# Altium PCB powersuuply.PcbDoc
Units mm, origin at the board's own origin, x right, y up, seen from the top; angles counter-clockwise.
Board outline 81.66 x 59.31 mm, 2 copper layers (Top Layer, Bottom Layer); 15 components, 12 nets, 61 pads, 0 vias.
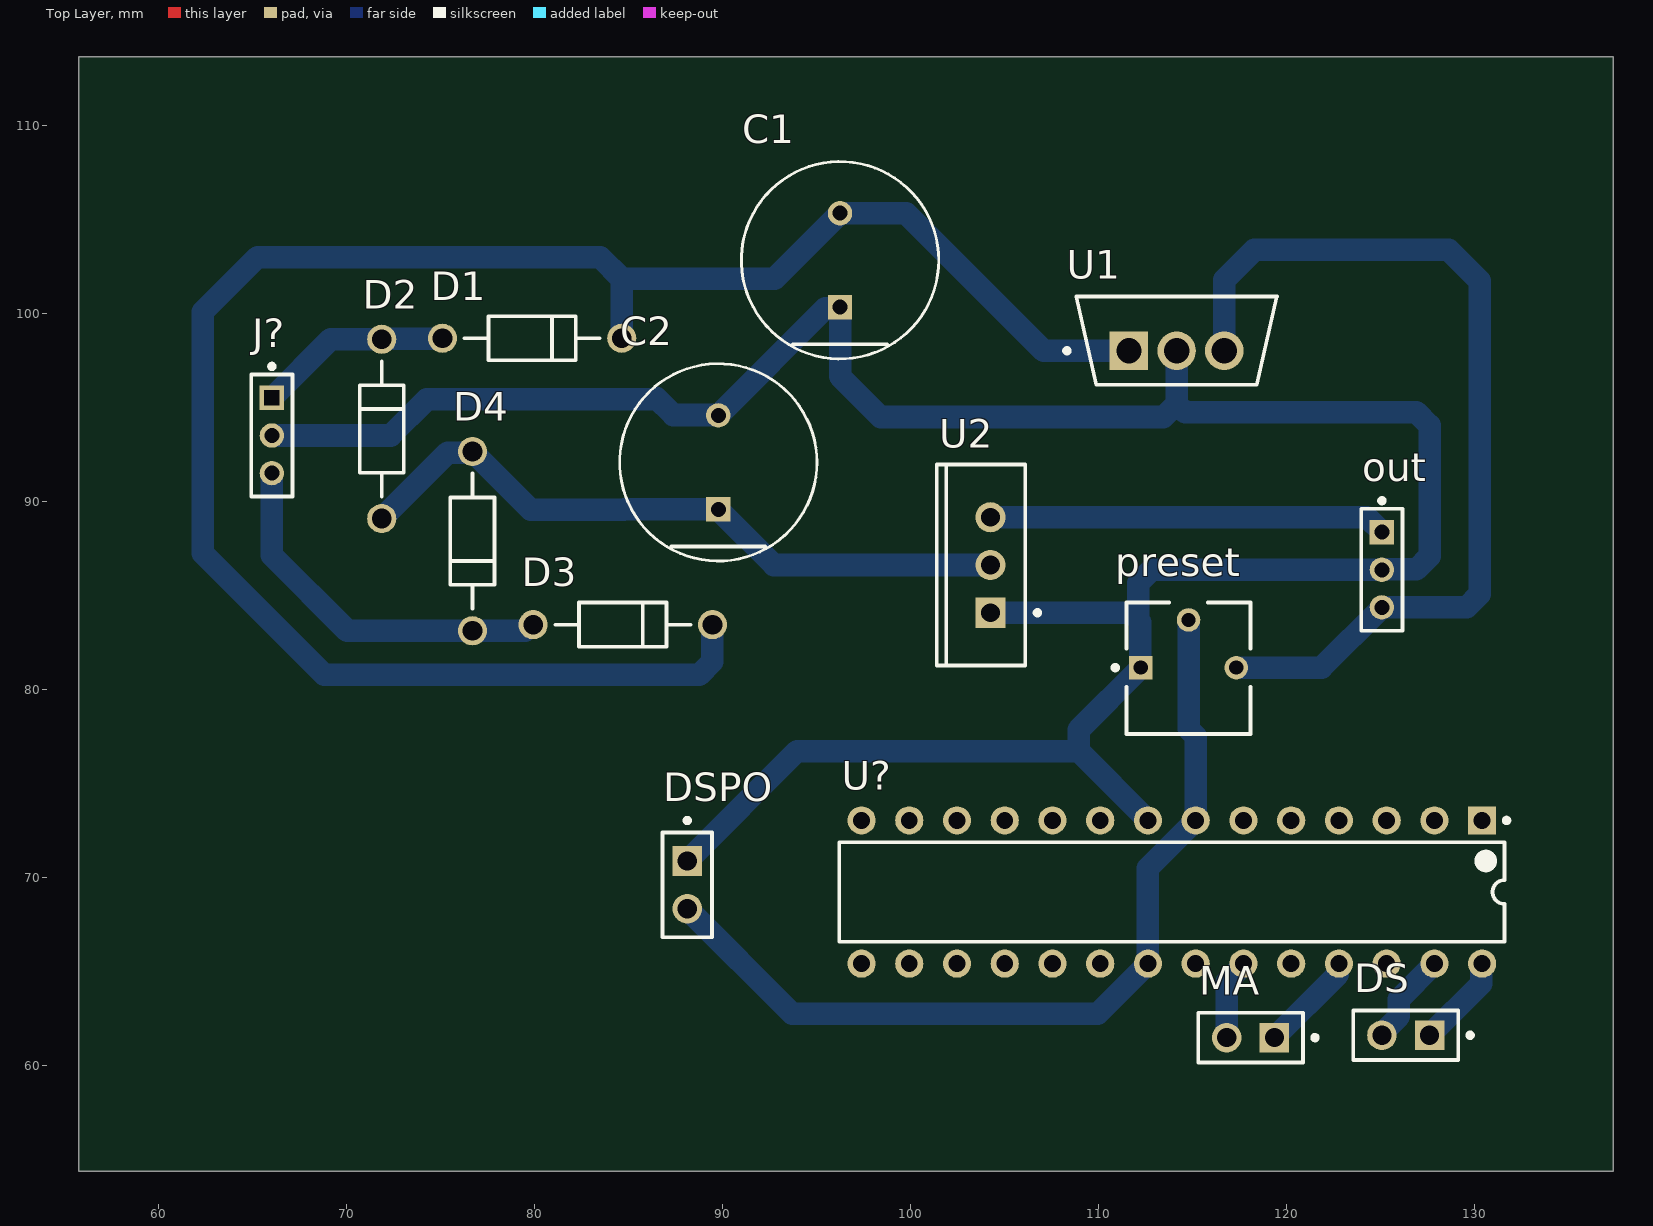
[diagram p0: Top Layer view]
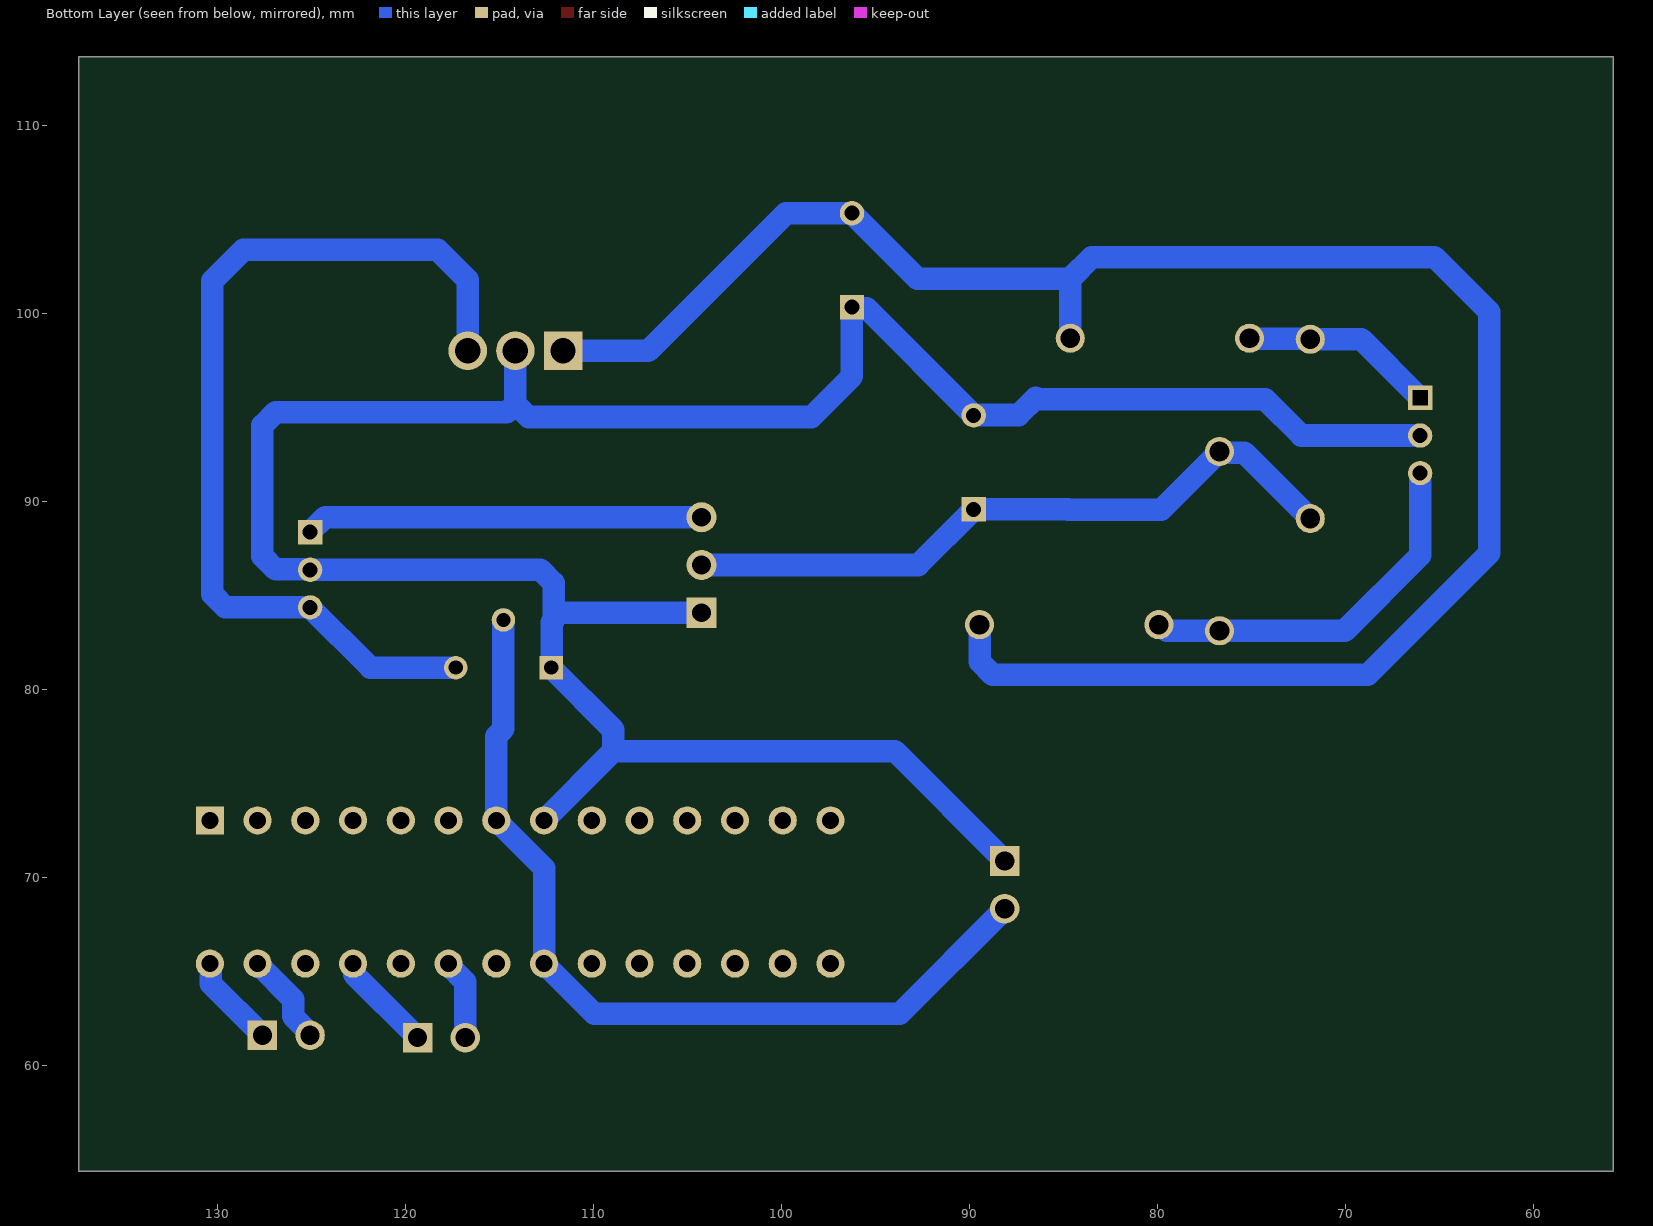
[diagram p1: Bottom Layer view, seen from below]
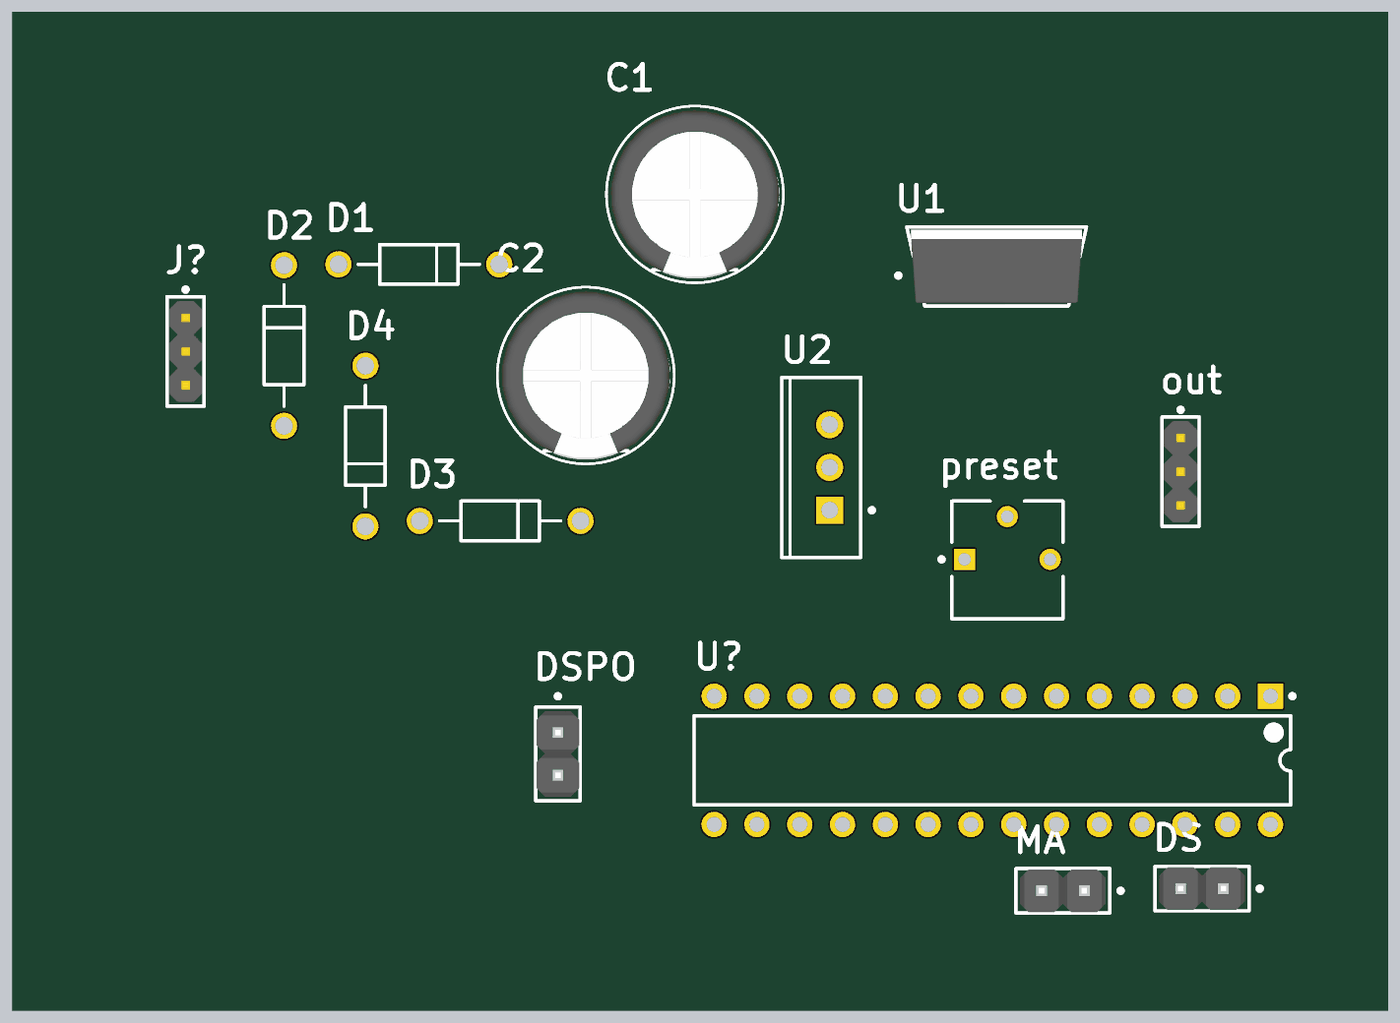
[diagram p2: 3D render of the assembled board from above, using the file's embedded part models]

## Layer stack, top to bottom
Top Solder: solder mask 0.0102, Solder Resist, Dk 3.5
Top Layer: signal copper 0.0356
Dielectric 1: dielectric 0.32, FR-4, Dk 4.8
Bottom Layer: signal copper 0.0356
Bottom Solder: solder mask 0.0102, Solder Resist, Dk 3.5

## Board outline
55.753,54.356 137.414,54.356 137.414,113.665 55.753,113.665

## Design rules (kind name [scope] priority, off if disabled: settings)
Clearance [All] p1: gap=0.254 ignorepadtopadclearanceinfootprint=FALSE except(0: Arc-Hole Track-Hole SMDPad-Hole THPad-Hole Via-Hole Fill-Hole Poly-Hole Region-Hole Text-Hole)
PolygonConnect [All] p1: connectstyle=Relief reliefconductorwidth=0.254 reliefentries=4 polygonreliefangle="90 Angle" airgapwidth=0.254
RoutingVias [All] p1: holewidth=0.711 width=1.27 viastyle="Through Hole" minholewidth=0.711 minwidth=1.27 maxholewidth=0.711 maxwidth=1.27
SolderMaskExpansion [All] p1: expansion=0.102 istentingtop=FALSE
Width Width_1 [All] p1: maxlimit=1.2 minlimit=0.9 preferedwidth=0.9
Width Width_Normal [(InNet('Netpreset_2') OR InNet('NetMA_1') OR InNet('NetMA_2') OR InNet('NetDS_1') OR InNet('NetDS_1'))] p2: maxlimit=0.9 minlimit=0.8 preferedwidth=0.9
30 further rules are at their usual default settings.

## Components (designator, comment, footprint, x,y, rotation, side; value= is the part's Value field where it differs from the comment)
C1 "EEUFK1A272L" FP-RAD-TH-D_10_0_5-L_30_2-MFG 96.266,102.83 r90 top
C2 "EEUFK1A272L" FP-RAD-TH-D_10_0_5-L_30_2-MFG 89.789,92.075 r90 top
D1 "1N4007G" ONSC-AXIAL_LEAD-2-59-10_P 79.883,98.679 r180 top
D2 "1N4007G" ONSC-AXIAL_LEAD-2-59-10_P 71.882,93.853 r270 top
D3 "1N4007G" ONSC-AXIAL_LEAD-2-59-10_P 84.709,83.439 r180 top
D4 "1N4007G" ONSC-AXIAL_LEAD-2-59-10_P 76.708,87.884 r90 top
DS "M20-9990246" FP-M20-9990246-MFG 126.365,61.595 r180 top
DSPO "M20-9990246" FP-M20-9990246-MFG 88.138,69.596 r270 top
J? "NRPN031PAEN-RC" FP-NRPN031PAEN-RC-MFG#1 66.04,93.504 r270 top
MA "M20-9990246" FP-M20-9990246-MFG 118.11,61.468 r180 top
out "NRPN031PAEN-RC" FP-NRPN031PAEN-RC-MFG#2 125.095,86.36 r270 top
preset "3362P-1-103LF" BOUR-3362P 114.808,81.118 r0 top
U1 "LM7812CT" FP-TO220B03-MFG 114.173,98.552 r90 top
U2 "LM7912CT" NDE0003A 104.267,86.614 r90 top
U? "ATmega328P-PU" 28P3 113.919,69.215 r270 top

## Footprints (in the part's own frame and the unit in brackets; to place one, negate y for a bottom-side part, rotate by r counter-clockwise, add the part's x,y. Pads: shape width x height; smd on the part's side, far side on the other; paste and mask are expansions set on the pad)
28P3 [mm] "28-Pin Plastic Dual In-Line Package (PDIP)"
  rect 1.5x1.5 hole 0.9: 1(-3.81,16.51)
  round 1.5 hole 0.9: 2(-3.81,13.97) 3(-3.81,11.43) 4(-3.81,8.89) 5(-3.81,6.35) 6(-3.81,3.81) 7(-3.81,1.27) 8(-3.81,-1.27) 9(-3.81,-3.81) 10(-3.81,-6.35) 11(-3.81,-8.89) 12(-3.81,-11.43) 13(-3.81,-13.97) 14(-3.81,-16.51) 15(3.81,-16.51) 16(3.81,-13.97) 17(3.81,-11.43) 18(3.81,-8.89) 19(3.81,-6.35) 20(3.81,-3.81) 21(3.81,-1.27) 22(3.81,1.27) 23(3.81,3.81) 24(3.81,6.35) 25(3.81,8.89) 26(3.81,11.43) 27(3.81,13.97) 28(3.81,16.51)
  silkscreen extent -3.93,-17.7 2.65,17.94, body extent -3.6,-17.65 3.6,17.65, height 4.58
BOUR-3362P [mm] "THD, 3-Leads, Body 6.6x6.99mm, Pitch 2.54mm"
  rect 1.25x1.25 hole 0.75: 1(-2.54,0.035)
  round 1.25 hole 0.75: 2(0,2.575) 3(2.54,0.035)
  silkscreen extent -4.02,-3.49 3.3,3.49, body extent -3.3,-3.49 3.3,3.49, height 4.95
FP-M20-9990246-MFG [mm]
  rect 1.57x1.57 hole 1.02 paste-1000 mask+0: 1(-1.27,0)
  round 1.57 hole 1.02 paste-1000 mask+0: 2(1.27,0)
  silkscreen extent -3.55,-1.32 2.79,1.32, body extent -2.89,-1.42 2.89,1.42, height 0.25
FP-NRPN031PAEN-RC-MFG#1 [mm]
  rect 1.3x1.3 hole 0.8 square paste-1000 mask+0: 1(-2,0)
  round 1.3 hole 0.8 paste-1000 mask+0: 2(0,0) 3(2,0)
  silkscreen extent -3.8,-1.1 3.25,1.1, body extent -3.35,-1.2 3.35,1.2, height 0.25
FP-NRPN031PAEN-RC-MFG#2 [mm]
  rect 1.3x1.3 hole 0.8 paste-1000 mask+0: 1(-2,0)
  round 1.3 hole 0.8 paste-1000 mask+0: 2(0,0) 3(2,0)
  silkscreen extent -3.8,-1.1 3.25,1.1, body extent -3.35,-1.2 3.35,1.2, height 0.25
FP-RAD-TH-D_10_0_5-L_30_2-MFG [mm]
  rect 1.3x1.3 hole 0.8 paste-1000 mask+0: 1(-2.5,0)
  round 1.3 hole 0.8 paste-1000 mask+0: 2(2.5,0)
  silkscreen extent -5.25,-5.25 5.25,5.25, body extent -5.35,-5.35 5.35,5.35, height 0.25
FP-TO220B03-MFG [mm]
  rect 2.05x2.05 hole 1.35 paste-1000 mask+0: 1(-0.54,2.535)
  round 2.05 hole 1.35 paste-1000 mask+0: 2(-0.54,0) 3(-0.54,-2.535)
  silkscreen extent -2.35,-5.34 2.35,5.96, body extent -2.45,-5.44 2.45,5.44, height 0.25
NDE0003A [mm] "FM, 3-Leads, Body 10.7x4.7mm, Pitch 2.54mm"
  rect 1.6x1.6 hole 1: 1(-2.54,0)
  round 1.6 hole 1: 2(0,0) 3(2.54,0)
  silkscreen extent -5.35,-2.63 5.35,2.85, body extent -5.4,-1.9 5.4,2.9, height 19.4
ONSC-AXIAL_LEAD-2-59-10_P [mm] "AXIAL, 2-Leads, Diameter 2.35mm"
  round 1.55 hole 1.05: 1(-4.77,0) 2(4.77,0)
  silkscreen extent -3.6,-1.18 3.6,1.18

## Part data
C1 C2: library part CMP-05427-001545-1, "Aluminum Electrolytic Capacitors (Radial Lead Type) AEC-Q200 Qualified 2700uF ±20% 10V", Capacitance=2.7mF, Case/Package=Radial, Dielectric Material=Aluminium, Max Operating Temperature=105°C, Min Operating Temperature=-55°C, Package Quantity=100, Ripple Current=2.14A, Tolerance=20%, Voltage=10V, Construction=RADIAL, Diameter=10mm, Dissipation Factor=0.19%, Height=30mm, Lead Diameter=0.6mm, Lead Pitch=5mm, Lead/Base Style=Straight, Length=30mm, Life (Hours)=4000Hour, Mount="Through Hole", Packaging=Bulk, Radiation Hardening=No, REACH SVHC="No SVHC", RoHS Compliant=Yes, Series=FK, Termination=Radial, Voltage Rating=10V, Voltage Rating (DC)=10V
D1 D2 D3 D4: library part CMP-0902-00143-1, "Standard Recovery Rectifier, 2-Pin Axial_Lead, Pb-Free, Bulk Bag", Manufacturer="On Semiconductor", ComponentLink1Description="Manufacturer URL", ComponentLink1URL=http://www.onsemi.com/, ComponentLink2Description=Datasheet, ComponentLink2URL=http://www.onsemi.com/pub_link/Collateral/1N4001-D.PDF, ComponentLink3Description="Package Specification", ComponentLink3URL=http://www.onsemi.cn/pub_link/Collateral/59-10.PDF, DatasheetVersion="Rev. 13", IFSM Max (A)=30, IO(rec) Max (A)=1, Mounting Technology="Through Hole", PackageDescription="2-Pin, Axial Lead, Diameter 2.35 mm", PackageReference=AXIAL_LEAD-2-59-10, PackageVersion="Rev. U, 02/2005", Packing="Bulk Bag", PartNumber=1N4007G, RoHS=TRUE, Type="Standard Recovery", VRRM Max (V)=1000
DS DSPO MA: library part CMP-15831-000009-1, "CONN HEADER VERT 2POS 2.54MM", Current Rating=3A, Manufacturer=Harwin, Temperature="-40°C to +105°C", Temperature Range High=+105°C, Temperature Range Low=-40°C, Automotive=No, Category=Conn, ComponentLink2Description=Datasheet, ComponentLink2URL=https://cdn.harwin.com/pdfs/M20-999.pdf, Conn Gender=Male, Conn Orientation=Vertical, Contact Material=Tin,Nickel, Device Class L1=Connectors, Device Class L2="Headers and Wire Housings", Device Class L3=unset, Digikey Description="CONN HEADER VERT 2POS 2.54MM", Height=8.99mm, Lead Free=Yes, Manufacturer Part Number=M20-9990246, Mouser Description="2.54mm (0.1\") Pitch SIL Vertical PC Tail Pin Header, 6.1mm mating pin height, tin, 2 contacts", Number Of Contacts=2, Number Of Rows=1, Octopart=https://octopart.com/m20-9990246-harwin-2590635, Package=M20-9990246, Pitch=2.54mm, RoHS=TRUE
J? out: library part CMP-25680-000021-1, "CONN HEADER VERT 3POS 2MM", Current Rating=2A, Manufacturer=Sullins, Package=0, Temperature="-40°C to +105°C", Temperature Range High=+105°C, Temperature Range Low=-40°C, Voltage Rating=150V, Automotive=No, Category=Conn, ComponentLink2Description=Datasheet, ComponentLink2URL=https://drawings-pdf.s3.amazonaws.com/10531.pdf, Conn Gender=Male, Conn Orientation=Straight, Contact Material=Gold,Nickel, Device Class L1=Connectors, Device Class L2="Headers and Wire Housings", Device Class L3=unset, Digikey Description="CONN HEADER VERT 3POS 2MM", Height=6mm, Lead Free=Yes, Manufacturer Part Number=NRPN031PAEN-RC, Number Of Contacts=3, Number Of Rows=1, Octopart=https://octopart.com/nrpn031paen-rc-sullins-12817732, Pitch=2mm, RoHS=TRUE
preset: library part CMP-1747-00004-1, "Square Trimpot(R) Trimming Potentiometer, 10 KOhm, 300 V, -55 to 125 degC, 3-Pin THD, RoHS, Tube", Case Code (Imperial)=0612, Case Code (Metric)=1632, Case/Package=1206, Max Operating Temperature=125degC, Min Operating Temperature=-25degC, Package Quantity=5000, Power Rating="1 W", Resistance="50 mohm", Tolerance=1%, Voltage Rating="220 mV", ComponentLink1Description="Manufacturer URL", ComponentLink1URL=http://www.bourns.com/, ComponentLink2Description=Datasheet, ComponentLink2URL=http://www.bourns.com/docs/Product-Datasheets/3362.pdf, DatasheetVersion=May-16, Height="0.6 mm", Length="3.2 mm", Mount="Surface Mount", PackageDescription="3-Pin Through Hole Device, Body 6.6 x 6.99 mm, Pitch 2.54 mm", PackageReference=3326P, Packaging="Tape and Reel", Pins=2, REACH SVHC="No SVHC", RoHSCompliant=True, Width="1.6 mm"
U1: library part CMP-07128-000015-1, "IC REG LINEAR 12V 1A TO220-3", Dropout Voltage=2V, Manufacturer="ON Semiconductor", Max Supply Voltage=35V, Nominal Supply Current=5.1mA, Output Current=1A, Output Voltage=12V, Package=TO220B03, Temperature="-40°C to +125°C", Temperature Range High=+125°C, Temperature Range Low=-40°C, Accuracy Percentage=4%, Automotive=No, Category=IC, ComponentLink2Description=Datasheet, ComponentLink2URL=https://www.mouser.in/datasheet/2/308/LM7812-1125088.pdf, Device Class L1="Integrated Circuits (ICs)", Device Class L2="Power Management ICs", Device Class L3="Voltage Regulators - Linear", Digikey Description="IC REG LINEAR 12V 1A TO220-3", Height=20.4mm, Ipc Land Pattern Name=TO-220, Lead Free=Yes, Manufacturer Part Number=LM7812CT, Number Of Outputs=1, Obsolete Part=true, Octopart=https://octopart.com/lm7812ct-on+semiconductor-14383031, Output Type=Fixed, RoHS=TRUE, Standoff Height=2.7mm
U2: library part CMP-0062-02472-3, "3-Terminal Negative Regulator, 3-pin TO-220", Manufacturer="Texas Instruments", PackageTopMarking=NSUZXYTTE#*LM7912CT, PowerWise=N, ComponentLink1Description="Datasheet URL", ComponentLink1URL=http://www.ti.com/general/docs/lit/getliterature.tsp?genericPartNumber=LM7912&fileType=pdf, CompType="LDO IC", PackageDescription="TO-220, Molded, 3 Lead, Straight", PackageReference=NDE0003A, PinCount=3, RoHS=N
U?: library part CMP-0095-00013-2, "8-bit AVR Microcontroller, 32KB Flash, 1KB EEPROM, 2KB SRAM, 28-pin PDIP, Industrial Grade (-40°C to 85°C)", ComponentLink1Description="Manufacturer URL", ComponentLink1URL=http://www.atmel.com/, ComponentLink2Description="ATmega48A/48PA/88A/88PA/168A/168PA/328/328P Datasheet", ComponentLink2URL=http://www.atmel.com/dyn/resources/prod_documents/8271.pdf, ComponentLink3Description="ATmega48A/48PA/88A/88PA/168A/168PA/328/328P Summary", ComponentLink3URL=http://www.atmel.com/dyn/resources/prod_documents/8271S.pdf, DatasheetVersion="revD, May-2011", PackageDescription="28-lead (0.300\"/7.62mm Wide) Plastic Dual Inline Package (PDIP)", PackageReference=28P3, PackageVersion="revB, Sep-2001", RevisionNote="DatasheetVersion updated. URLs added."

## Nets (pads, with @x,y where several pads share a name; then routed paths per layer and width w, separated by ;. In a path a pad name is that pad's centre, name@x,y a point inside that pad or via, vN(x,y) a via of type N, cw(c..) or ccw(c..) an arc to the next point about the centre after c; other vN are vias at no path point)
NetC1_1: C1.1 C2.2 DSPO.1 J?.2 out.2 preset.1 U1.2 U2.1 U?.8 | length 142.4
  Bottom Layer w1.2: J?.2 72.356,93.504 74.276,95.424 86.407,95.424 86.487,95.504 87.397,94.594 89.77,94.594 C2.2 95.494,100.28 ; DSPO.1 93.98,76.708 108.966,76.708 ; C1.1 96.266,96.647 98.425,94.488 113.47,94.488 114.173,95.191 ; U2.1 111.887,84.074 112.141,84.328 ; U?.8 108.966,76.708 ; U1.2 114.173,95.191 ; 108.966,76.708 108.966,77.851 preset.1 112.243,81.178 112.243,83.578 112.141,83.68 112.141,84.328 ; 112.141,84.328 112.141,85.657 112.844,86.36 out.2 125.114,86.379 126.932,86.379 127.635,87.082 127.635,94.039 126.932,94.742 114.622,94.742 114.173,95.191
NetC1_2: C1.2 D1.1 D3.1 U1.1 | length 103.5
  Bottom Layer w1.2: D1.1 84.653,101.842 ; D3.1 89.479,81.475 88.776,80.772 68.834,80.772 62.357,87.249 62.357,100.076 65.278,102.997 83.498,102.997 84.653,101.842 ; U1.1 107.098,98.012 99.78,105.33 C1.2 92.778,101.842 84.653,101.842
NetC2_1: C2.1 D2.2 D4.2 U2.2 | length 36.4
  Bottom Layer w1.2: D2.2 75.386,92.587 76.641,92.587 D4.2 79.802,89.56 84.763,89.56 84.778,89.575 C2.1 92.75,86.614 U2.2
NetD1_2: D1.2 D2.1 J?.1 | length 10.4
  Bottom Layer w1.2: J?.1 69.159,98.623 D2.1 71.91,98.651 75.085,98.651 D1.2
NetD3_2: D3.2 D4.1 J?.3 | length 20.1
  Bottom Layer w1.2: J?.3 66.04,87.122 70.048,83.114 D4.1 79.519,83.114 79.844,83.439 D3.2
NetDS_1: DS.1 U?.28 | length 5
  Bottom Layer w1.2: DS.1 130.372,64.332 130.372,65.348 U?.28
NetDS_2: DS.2 U?.27 | length 5
  Bottom Layer w1.2: DS.2 125.095,61.695 125.996,62.596 125.996,63.512 U?.27
NetDSPO_2: DSPO.2 preset.2 U?.7 U?.21 | length 47.4
  Bottom Layer w1.2: DSPO.2 93.734,62.73 109.974,62.73 U?.21 112.649,70.485 U?.7 115.189,77.515 114.808,77.896 preset.2
NetMA_1: MA.1 U?.25 | length 5.4
  Bottom Layer w1.2: MA.1 122.752,64.84 122.752,65.348 U?.25
NetMA_2: MA.2 U?.23 | length 4.3
  Bottom Layer w1.2: MA.2 116.84,64.435 117.729,65.324 U?.23
Netout_1: out.1 U2.3 | length 21.2
  Bottom Layer w1.2: U2.3 124.301,89.154 out.1
Netout_3: out.3 preset.3 U1.3 | length 49.9
  Bottom Layer w1.2: U1.3 116.708,101.781 118.305,103.378 128.651,103.378 130.302,101.727 130.302,85.063 129.599,84.36 out.3 121.888,81.153 preset.3
pads on no net: U?.1 U?.2 U?.3 U?.4 U?.5 U?.6 U?.9 U?.10 U?.11 U?.12 U?.13 U?.14 U?.15 U?.16 U?.17 U?.18 U?.19 U?.20 U?.22 U?.24 U?.26